# Altium PCB PCB1.PcbDoc
Units mil, origin at the board's own origin, x right, y up, seen from the top; angles counter-clockwise.
Board outline 8338.58 x 5307.09 mil, 2 copper layers (Top Layer, Bottom Layer); 100 components, 71 nets, 299 pads, 6 vias.
Unrouted connection lines stored in the file: 10.
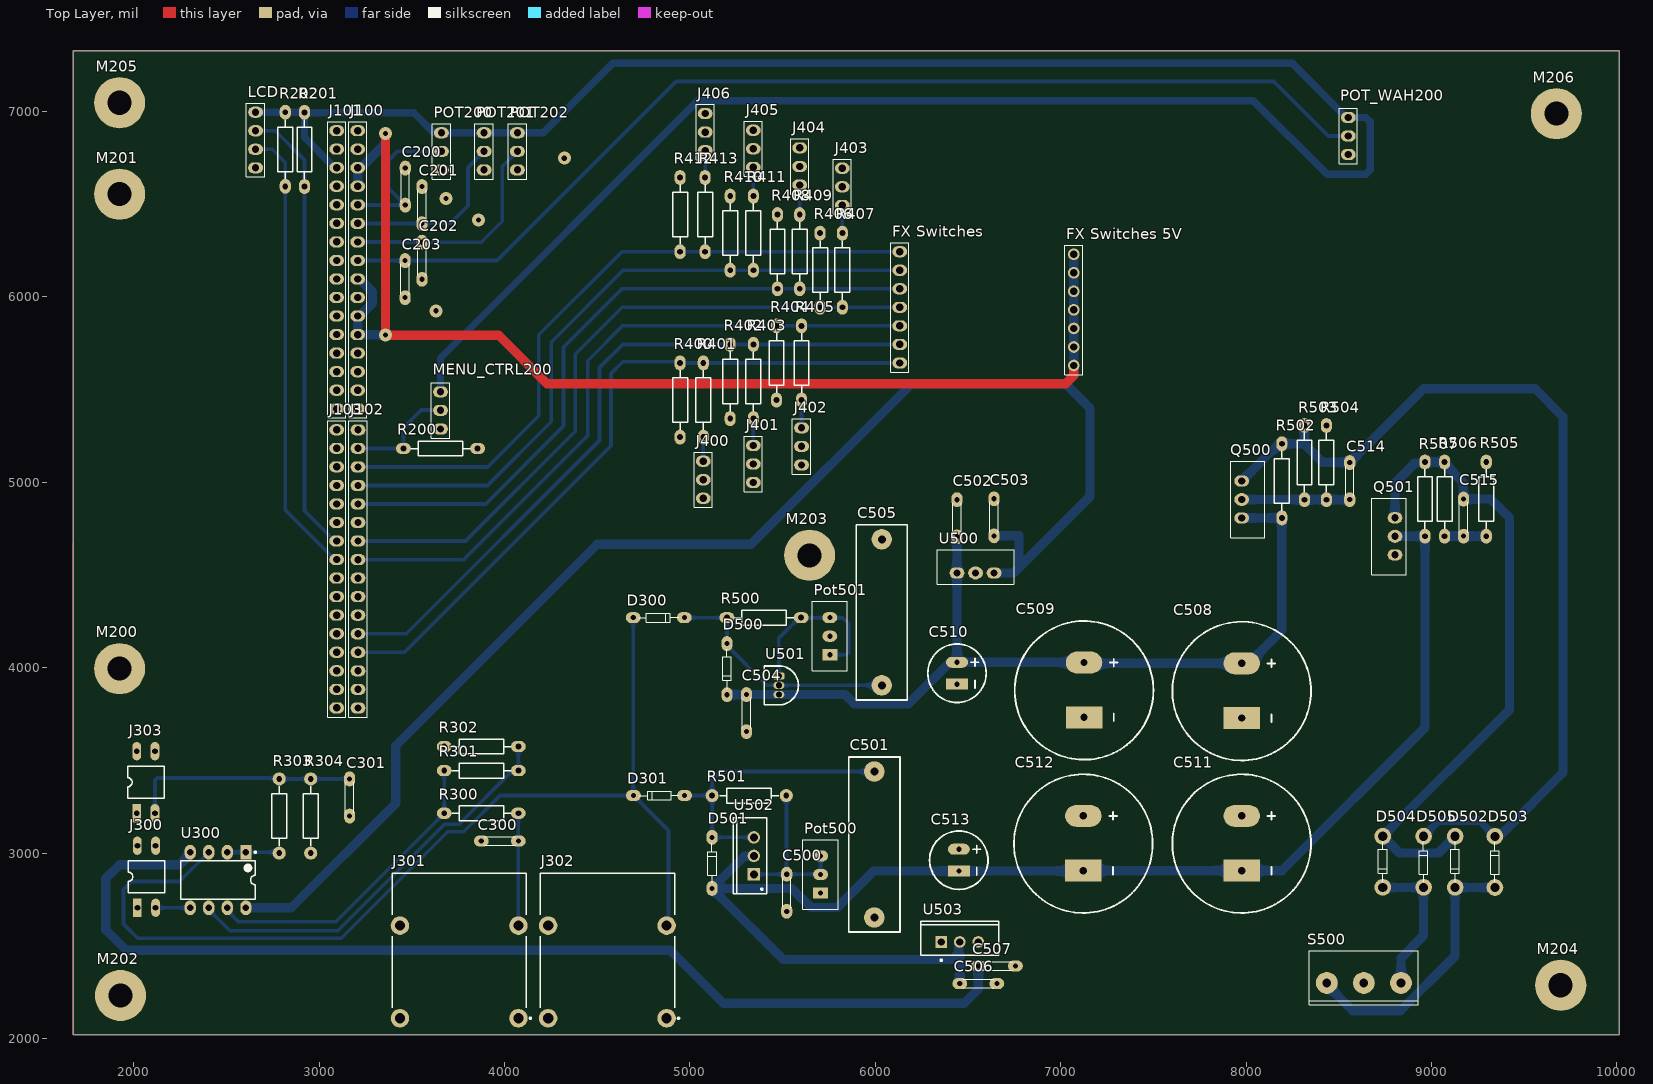
[diagram p0: Top Layer view]
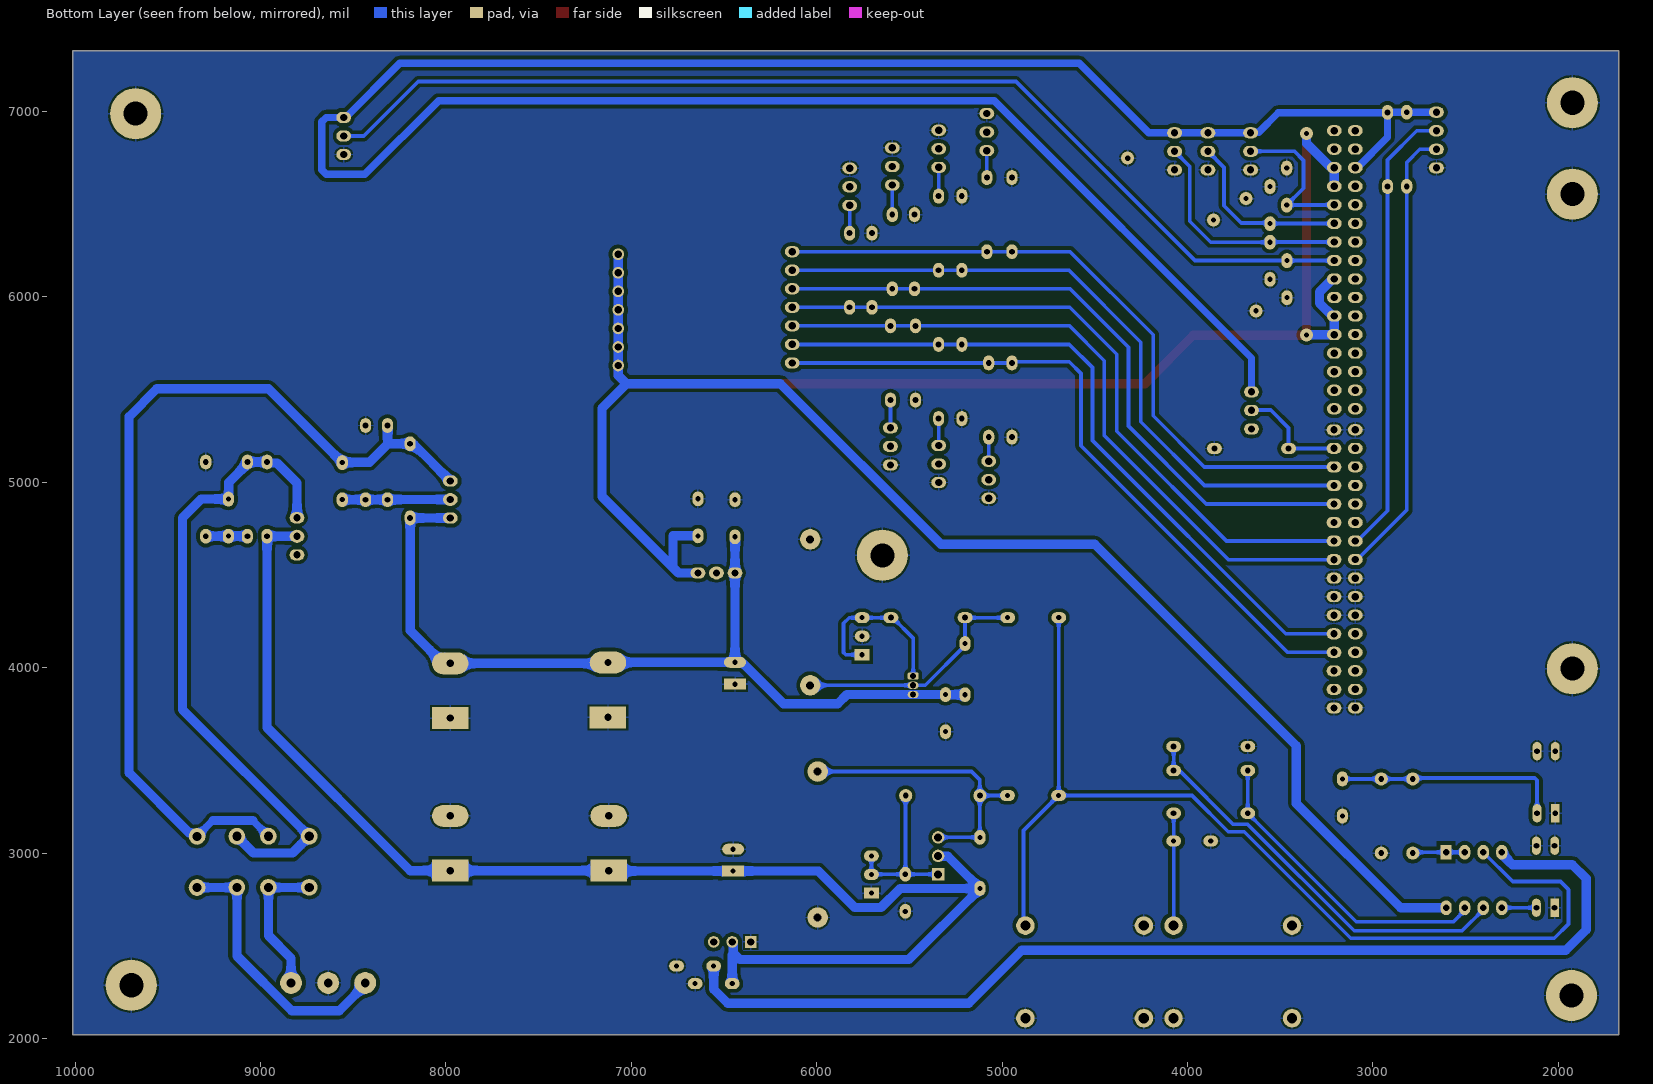
[diagram p1: Bottom Layer view, seen from below]

## Layer stack, top to bottom
Top Solder: solder mask 0.4, Solder Resist, Dk 3.5
Top Layer: signal copper 1.4
Dielectric 1: dielectric 12.6, FR-4, Dk 4.8
Bottom Layer: signal copper 1.4
Bottom Solder: solder mask 0.4, Solder Resist, Dk 3.5

## Board outline
1673.23,2019.68 1673.23,7326.77 10011.81,7326.77 10011.81,2019.68

## Design rules (kind name [scope] priority, off if disabled: settings)
Clearance [All] p1: gap=20 ignorepadtopadclearanceinfootprint=FALSE
PolygonConnect [All] p1: connectstyle=Relief reliefconductorwidth=10 reliefentries=4 polygonreliefangle="90 Angle" airgapwidth=10
RoutingVias [All] p1: holewidth=28 width=50 viastyle="Through Hole" minholewidth=28 minwidth=50 maxholewidth=28 maxwidth=50
SolderMaskExpansion [All] p1: expansion=4 istentingtop=FALSE
SupplyNets "Schematic Supply Nets_4" [InNet('VCC_USB_DUAL')] p1: voltage=0.000
SupplyNets "Schematic Supply Nets_8" [InNet('-6V')] p2: voltage=0.000
SupplyNets "Schematic Supply Nets_7" [InNet('VCC_3V3')] p3: voltage=0.000
SupplyNets "Schematic Supply Nets_6" [InNet('+6V')] p4: voltage=0.000
SupplyNets "Schematic Supply Nets_5" [InNet('-1V75')] p5: voltage=0.000
SupplyNets "Schematic Supply Nets_1" [InNet('-5V')] p6: voltage=0.000
SupplyNets "Schematic Supply Nets" [InNet('+1V75')] p7: voltage=0.000
SupplyNets "Schematic Supply Nets_3" [InNet('GND')] p8: voltage=0.000
Width [All] p1: maxlimit=40 minlimit=20 preferedwidth=20 minimp=50.000000 maximp=50.000000 favimp=50.000000
30 further rules are at their usual default settings.

## Classes and differential pairs
component class switches_connectors: C200 C201 C202 C203 "FX Switches 5V" LCD M200 M201 M202 M203 M204 M205 M206 MENU_CTRL200 POT200 POT201 POT202 POT_WAH200 R200 R201 R202
component class power_supply: *500 *501 *502 *503 C500 C501 C502 C503 C504 C505 C506 C507 C508 C509 C510 C511 C512 C513 C514 C515 D500 D501 D502 D503 D504 D505 Pot500 Pot501 Q500 Q501 R500 R501 R502 R503 R504 R505 R506 R507 S500 U500 U501 U502 U503
component class main: J100 J101 J102 J103
component class amplifier_stage: C300 C301 D300 D301 J300 J301 J302 J303 R300 R301 R302 R303 R304 U300
component class shift_registers: "FX Switches" J400 J401 J402 J403 J404 J405 J406 R400 R401 R402 R403 R404 R405 R406 R407 R408 R409 R410 R411 R412 R413

## Components (designator, comment, footprint, x,y, rotation, side; value= is the part's Value field where it differs from the comment)
C200 "Cap" Cap-1 3465,6695 r270 top
C201 "Cap" Cap-1 3555,6595 r270 top
C202 "Cap" Cap-1 3555,6095 r90 top
C203 "Cap" Cap-1 3464.26,5995.74 r90 top
C300 "Cap" Cap-1 3875,3065 r0 top
C301 "Cap" Cap-1 3165,3200 r90 top
C500 "Cap" Cap-1 5522.27,2886.13 r270 top
C501 "Cap" "Cap 20mm" 5995,3440 r270 top
C502 "Cap" Cap-1 6440.79,4906.06 r270 top
C503 "Cap" Cap-1 6640.79,4911.06 r270 top
C504 "Cap" Cap-1 5305,3655 r90 top
C505 "Cap" "Cap 20mm" 6035,4692.4 r270 top
C506 "Cap" Cap-1 6455.79,2296.06 r0 top
C507 "Cap" Cap-1 6555.79,2391.06 r0 top
C508 "Cap" "Cap Lyt Ø18" 7976.38,4023.62 r270 top
C509 "Cap" "Cap Lyt Ø18" 7125.98,4027.56 r270 top
C510 "Cap" "Cap Lyt Ø8" 6440.79,4029.17 r270 top
C511 "Cap" "Cap Lyt Ø18" 7976.38,3200.79 r270 top
C512 "Cap" "Cap Lyt Ø18" 7122.05,3200.79 r270 top
C513 "Cap" "Cap Lyt Ø8" 6450.79,3021.06 r270 top
C514 "Cap" Cap-1 8559.06,4906.3 r90 top value=1uF
C515 "Cap" Cap-1 9173.23,4909.45 r270 top value=1uF
D300 "Diode DO-35" "Diode 2 space"#1 4694.41,4270 r0 top
D301 "Diode DO-35" "Diode 2 space"#1 4971.11,3310.98 r180 top
D500 "Diode DO-35" "Diode 2 space"#1 5200,4130 r270 top
D501 "Diode DO-35" "Diode 2 space"#1 5120,2809.41 r90 top
D502 "Diode DO-35" "Diode 2 space"#2 9127.24,3090.71 r270 top
D503 "Diode DO-35" "Diode 2 space"#2 9342.24,2814.53 r90 top
D504 "Diode DO-35" "Diode 2 space"#2 8737.24,3090.71 r270 top
D505 "Diode DO-35" "Diode 2 space"#2 8957.24,2815.12 r90 top
"FX Switches" "Header 1x7" "Header 1x7"#1 6132.36,6243.78 r270 top
"FX Switches 5V" "Header 1x7" "Header 1x7"#2 7070.87,5629.92 r90 top
J100 "Header 1x16" "Header 1x16" 3208.43,5396.49 r90 top
J101 "Header 1x16" "Header 1x16" 3095,5396.7 r90 top
J102 "Header 1x16" "Header 1x16" 3210,3783.06 r90 top
J103 "Header 1x16" "Header 1x16" 3094.95,3783.27 r90 top
J300 "3.5MMJACK" 3.5MMJACK 2020,2705.35 r90 top
J301 "NMJ4HFD2" FP-NMJ4HFD2-MFG 3755.91,2236.22 r270 top
J302 "NMJ4HFD2" FP-NMJ4HFD2-MFG 4555.12,2236.22 r270 top
J303 "3.5MMJACK" 3.5MMJACK 2016.57,3215 r90 top
J400 "Header 1x3" "Header 1x3" 5072.36,4913.78 r90 top
J401 "Header 1x3" "Header 1x3" 5342.36,4998.78 r90 top
J402 "Header 1x3" "Header 1x3" 5602.36,5093.78 r90 top
J403 "Header 1x3" "Header 1x3" 5822.36,6693.78 r270 top
J404 "Header 1x3" "Header 1x3" 5592.36,6803.78 r270 top
J405 "Header 1x3" "Header 1x3" 5342.36,6898.78 r270 top
J406 "Header 1x3" "Header 1x3" 5082.36,6988.78 r270 top
LCD "Header 1x4" "Header 1x4" 2657.48,6696.06 r90 top
M200 "Screw Hole" "M3 Hole" 1924.13,3995 r0 top
M201 "Screw Hole" "M3 Hole" 1924.13,6554.25 r0 top
M202 "Screw Hole" "M3 Hole" 1929.13,2232.28 r0 top
M203 "Screw Hole" "M3 Hole" 5645.67,4606.3 r0 top
M204 "Screw Hole" "M3 Hole" 9696.85,2287.4 r0 top
M205 "Screw Hole" "M3 Hole" 1924.13,7047.24 r0 top
M206 "Screw Hole" "M3 Hole" 9673.23,6988.19 r0 top
MENU_CTRL200 "Header 1x3" "Header 1x3" 3655,5287.89 r90 top
POT200 "Header 1x3" "Header 1x3" 3660,6685 r90 top
POT201 "Header 1x3" "Header 1x3" 3890,6685 r90 top
POT202 "Header 1x3" "Header 1x3" 4070,6685 r90 top
Pot500 "Pot Trim" "Pot trim slim high" 5705,2885 r90 top
Pot501 "Pot Trim" "Pot trim slim high" 5755,4170 r90 top
POT_WAH200 "Header 1x3" "Header 1x3" 8551.18,6767.72 r90 top
Q500 "ModelNum" TO-220#1 7976.38,5007.09 r270 top
Q501 "ModelNum" TO-220#1 8803.15,4608.66 r90 top
R200 "Res2" "AXIAL-0.4 PCBK"#1 3655,5182.24 r180 top value=100
R201 "" "AXIAL-0.4 PCBK"#1 2921.26,6795.28 r90 top value=1k
R202 "" "AXIAL-0.4 PCBK"#1 2817.83,6796.27 r90 top value=1k
R300 "Res2" "AXIAL-0.4 PCBK"#1 3875,3215 r0 top value=1k47
R301 "Res2" "AXIAL-0.4 PCBK"#1 3875,3445 r180 top value=14k7
R302 "Res2" "AXIAL-0.4 PCBK"#1 3875,3575 r0 top value=10k
R303 "Res2" "AXIAL-0.4 PCBK"#2 2785,3200 r90 top value=1k47
R304 "Res2" "AXIAL-0.4 PCBK"#2 2955,3200 r90 top value=1k
R400 "" "AXIAL-0.4 PCBK"#1 4947.36,5443.78 r90 top value=4k
R401 "" "AXIAL-0.4 PCBK"#1 5072.36,5443.78 r90 top value=400
R402 "" "AXIAL-0.4 PCBK"#1 5217.36,5543.78 r90 top value=4k
R403 "" "AXIAL-0.4 PCBK"#1 5342.36,5543.78 r90 top value=400
R404 "" "AXIAL-0.4 PCBK"#1 5467.36,5643.78 r90 top value=4k
R405 "" "AXIAL-0.4 PCBK"#1 5602.36,5643.78 r90 top value=400
R406 "" "AXIAL-0.4 PCBK"#1 5702.36,6143.78 r270 top value=4k
R407 "" "AXIAL-0.4 PCBK"#1 5822.36,6143.78 r270 top value=400
R408 "" "AXIAL-0.4 PCBK"#1 5472.36,6243.78 r270 top value=4k
R409 "" "AXIAL-0.4 PCBK"#1 5592.36,6243.78 r270 top value=400
R410 "" "AXIAL-0.4 PCBK"#1 5217.36,6343.78 r270 top value=4k
R411 "" "AXIAL-0.4 PCBK"#1 5342.36,6343.78 r270 top value=400
R412 "" "AXIAL-0.4 PCBK"#1 4947.36,6443.78 r270 top value=4k
R413 "" "AXIAL-0.4 PCBK"#1 5082.36,6443.78 r270 top value=400
R500 "" "AXIAL-0.4 PCBK"#1 5400,4270 r180 top value=240
R501 "" "AXIAL-0.4 PCBK"#2 5320,3310 r0 top value=120
R502 "" "AXIAL-0.4 PCBK"#1 8192.91,5007.87 r90 top value=10
R503 "" "AXIAL-0.4 PCBK"#1 8314.96,5106.3 r90 top value=200k
R504 "" "AXIAL-0.4 PCBK"#1 8433.07,5106.3 r270 top value=10k
R505 "" "AXIAL-0.4 PCBK"#1 9295.28,4909.45 r90 top value=10k
R506 "" "AXIAL-0.4 PCBK"#1 9070.87,4909.45 r270 top value=200k
R507 "" "AXIAL-0.4 PCBK"#1 8964.57,4909.45 r90 top value=10
S500 "Screw 3" Screw-3 8435.39,2300 r0 top
U300 "OP275GPZ" ADI-N-8 2455,2855 r270 top
U500 "LM7805" TO-220#2 6440.79,4511.06 r0 top
U501 "LM317" TO-92_straight 5480,3955 r270 top
U502 "LM337SP" TO220 5345,2985 r90 top
U503 "LM7905CT/NOPB" NDE0003A 6455.79,2521.06 r0 top

## Footprints (in the part's own frame and the unit in brackets; to place one, negate y for a bottom-side part, rotate by r counter-clockwise, add the part's x,y. Pads: shape width x height; smd on the part's side, far side on the other; paste and mask are expansions set on the pad)
3.5MMJACK [mm]
  rect 2.5x1.2 hole 0.8: 1(0,0)
  oval 2.5x1.2 hole 0.8: 2(8.5,0) 3(0,-2.5) 4(8.5,-2.5)
  silkscreen extent 2.08,-3.75 6.42,1.25
ADI-N-8 [mil] "DIP, 8-Leads, Body 9.59x6.6mm, Pitch 2.54mm"
  rect 80x60 hole 35.43: 1(-150,150)
  oval 80x60 hole 35.43: 2(-150,50) 3(-150,-50) 4(-150,-150) 5(150,-150) 6(150,-50) 7(150,50) 8(150,150)
  silkscreen extent -155,-201 104,206, body extent -155,-200 155,200, height 210
"AXIAL-0.4 PCBK"#1 [mil]
  oval 80x60 hole 31.5: 1(-200,0) 2(200,0)
  silkscreen extent -160,-40 160,40
"AXIAL-0.4 PCBK"#2 [mil]
  round 70.87 hole 31.5: 1(-200,0) 2(200,0)
  silkscreen extent -160,-40 160,40
"Cap 20mm" [mm] "Capacitor with 20mm hole distance (center)"
  round 2.8 hole 1.1: 1(0,0) 2(20,0)
  silkscreen extent -2,-3.5 22,3.5
"Cap Lyt Ø8" [mm] "Capacitor"
  oval 1.5x3 hole 0.7: 1(0,0)
  rect 1.5x3 hole 0.7: 2(3,0)
  silkscreen extent -2.5,-4 5.5,4
"Cap Lyt Ø18" [mm] "Capacitor"
  oval 3x5 hole 1: 1(0,0)
  rect 3x5 hole 1: 2(7.5,0)
  silkscreen extent -5.7,-9.5 13.3,9.5, body extent -5.5,-9.25 13,9.25, height 38
Cap-1 [mil] "Capacitor with 1 space"
  oval 80x60 hole 27.56: 1(0,0) 2(200,0)
  silkscreen extent 18,-23 182,23
"Diode 2 space"#1 [mil] "Diode 2 emty spaces"
  oval 80x60 hole 27.56: 1(0,0) 2(275.59,0)
  silkscreen extent 31,-24 245,24, body extent -9,-30 284,30, height 59
"Diode 2 space"#2 [mil] "Diode 2 emty spaces"
  round 90 hole 50: 1(0,0) 2(275.59,0)
  silkscreen extent 31,-24 245,24, body extent -9,-30 284,30, height 59
FP-NMJ4HFD2-MFG [mm]
  round 2.54 hole 1.4 paste-2539.97 mask+0: S(3.225,8.115) SN(3.225,-8.115) T(-9.475,8.115) TN(-9.475,-8.115)
  silkscreen extent -16.63,-9.2 3.35,9.88, body extent -16.73,-9.3 16.73,9.3, height 0.25
"Header 1x3" [mil]
  oval 60x80 hole 39.37: 1(0,0) 2(100,0) 3(200,0)
  silkscreen extent -49,-49 249,49, body extent -50,-50 250,50, height 350
"Header 1x4" [mil]
  oval 60x80 hole 39.37: 1(0,0) 2(100,0) 3(200,0) 4(300,0)
  silkscreen extent -49,-49 349,49, body extent -50,-50 350,50, height 350
"Header 1x7"#1 [mil]
  oval 60x80 hole 39.37: 1(0,0) 2(100,0) 3(200,0) 4(300,0) 5(400,0) 6(500,0) 7(600,0)
  silkscreen extent -49,-49 649,49, body extent -50,-50 650,50, height 350
"Header 1x7"#2 [mil]
  round 62.99 hole 39.37: 1(0,0) 2(100,0) 3(200,0) 4(300,0) 5(400,0) 6(500,0) 7(600,0)
  silkscreen extent -49,-49 649,49, body extent -50,-50 650,50, height 350
"Header 1x16" [mil]
  oval 60x80 hole 39.37: 1(0,0) 2(100,0) 3(200,0) 4(300,0) 5(400,0) 6(500,0) 7(600,0) 8(700,0) 9(800,0) 10(900,0) 11(1000,0) 12(1100,0) 13(1200,0) 14(1300,0) 15(1400,0) 16(1500,0)
  silkscreen extent -49,-49 1549,49, body extent -50,-50 1550,50, height 350
"M3 Hole" [mm]
  round 7 hole 3.3 mask+0: 1(0,0)
NDE0003A [mm] "FM, 3-Leads, Body 10.7x4.7mm, Pitch 2.54mm"
  rect 1.6x1.6 hole 1: 1(-2.54,0)
  round 1.6 hole 1: 2(0,0) 3(2.54,0)
  silkscreen extent -5.35,-2.62 5.35,2.85, body extent -5.4,-1.9 5.4,2.9, height 19.4
"Pot trim slim high" [mil]
  rect 60x80 hole 27.95: 1(-100,0)
  oval 60x80 hole 27.95: 2(0,0) 3(100,0)
  silkscreen extent -188,-95 188,95, body extent -188,-95 188,95, height 455
Screw-3 [mm] "Screw Terminal with 3 connections"
  round 3 hole 1.2: 1(0,0) 2(5.075,0) 3(10.15,0)
  silkscreen extent -2.37,-3.03 12.52,4.43, body extent -2.95,-3.8 12.55,4, height 10.3
TO220 [mm] "TO, Thru-Hole, Vertical, Heatsink Mounted; 3 In-Line Leads; Pitch 2.54 mm"
  rect 1.7x1.7 hole 1.1: 1(-2.54,0)
  round 1.7 hole 1.1: 2(0,0) 3(2.54,0)
  silkscreen extent -5.2,-1.75 5.2,2.85, body extent -5.25,-1.8 5.25,2.9, height 19.7
TO-92_straight [mm] "Transistor Outline 3 leads"
  rrect50% 1x1.5 hole 0.85 mask+0.05: 1(0,0)
  oval 1x1.5 hole 0.85 mask+0.05: 2(1.27,0) 3(2.54,0)
  silkscreen extent -1.4,-2 3.94,2.67, body extent -1.24,-1.85 3.78,2.5, height 5.4
TO-220#1 [mil] "Transistor Outline 3 leads"
  oval 60x80 hole 39.37: 1(0,0) 3(200,0) ""(100,0)
  round 70.87 hole 39.37: 2(100,0)
  silkscreen extent -107,-60 306,125, body extent -101,-73 300,116, height 744
TO-220#2 [mil] "Transistor Outline 3 leads"
  oval 80x60 hole 39.37: 1(0,0) 3(200,0) 4(100,0)
  round 70.87 hole 39.37: 2(100,0)
  silkscreen extent -107,-60 306,125, body extent -101,-73 300,116, height 744

## Part data
C200 C201 C202 C203 C502 C503 C506 C507: library part "Capacitor 1 space", Capacity=2,2nF
C300: library part "Capacitor 1 space", Capacity=5n5F
C301: library part "Capacitor 1 space", Capacity=12nF
C500 C504: library part "Capacitor 1 space", Capacity=100nF
C501 C505: library part "Capacitor big ceramic", Capacity=1uF
C508 C511 C512: library part "Capacitor electrolytic", Capacity=1000uF
C509: library part "Capacitor electrolytic", Capacity=1000F
C510 C513: library part "Capacitor electrolytic", Capacity=220uF
C514 C515: library part "Capacitor 1 space"
J301 J302: library part CMP-78736-000001-1, "Conn 1/4\" Mono Jack F 3 POS Solder RA Thru-Hole 3 Terminal 1 Port", Current Rating=0.5A, Manufacturer=Neutrik, Package=0, Temperature="-25°C to +70°C", Temperature Range High=+70°C, Temperature Range Low=-25°C, Voltage Rating=50V, Automotive=No, Category=Conn, ComponentLink2Description=Datasheet, ComponentLink2URL=https://www.neutrik.com/en/product/nmj4hfd2.pdf, Conn Orientation=Horizontal, Contact Material=Silver, Device Class L1=Connectors, Device Class L2="Audio / Video Connectors", Device Class L3=unset, Footprint Url=https://www.neutrik.com/media/8576/download/st-nmj4hfd2.pdf?v=1, Height=15.89mm, Is Female=yes, Lead Free=Yes, Manufacturer Part Number=NMJ4HFD2, Mouser Description="Phone Audio Connector, Socket, 2, PCB Mount, Metal Body, Silver Plated Contacts", Number Of Contacts=2, Octopart=https://octopart.com/nmj4hfd2-neutrik-758952, RoHS=TRUE
Pot500 Pot501: "Potentiometer", Resistance=2k
Q500: library part "MOSFET P-Channel", Model=ModelNumber
Q501: library part "MOSFET N-Channel", Model=ModelNumber
R200 R201 R202 R300 R301 R302 R303 R304 R400 R401 R402 R403 R404 R405 R406 R407 R408 R409 R410 R411 R412 R413 R500 R501 R502 R503 R504 R505 R506 R507: library part "Res PCBK", "Resistor", LatestRevisionDate=17-Jul-2002, LatestRevisionNote="Re-released for DXP Platform.", PackageReference=AXIAL-0.4, Published=8-Jun-2000, Publisher="Altium Limited"
U300: library part CMP-0384-00207-1, "Double Channel Excellent Sonic Characteristics Operational Amplifier, 9 MHz BW, 22 V/us SR, Industrial, 8-pin DIP (N-8), Tube", Amplifiers Per Package=2, Generic Part Number=OP275, Input Bias Current=100nA, Input Offset Voltage=1mV, Manufacturer="Analog Devices", Code_JEDEC=MS-001, ComponentLink1Description="Manufacturer URL", ComponentLink1URL=http://www.analog.com/en/index.html, ComponentLink2Description=Datasheet, ComponentLink2URL=http://www.analog.com/static/imported-files/data_sheets/OP275.pdf, ComponentLink3Description="Package Specification", ComponentLink3URL=http:/www.analog.com/static/imported-files/packages/PKG_PDF/PDIP(N)/N_8.pdf, DatasheetVersion="Rev. C", Iq/Amp=2.5mA, Mounting Technology="Through Hole", PackageDescription="8-Pin Plastic Dual In-Line Package, Row spacing 7.62 mm, Pitch 2.54 mm", PackageReference=N-8, PackageVersion=070606-A, PartNumber=OP275GPZ, Slew Rate=22V/us, Small Signal Bandwidth=9MHz, V Span Max=44V, V Span Min=9V
U500: library part "Voltage Regulator"
U502: library part CMP-0244-00420-1, "Three-Terminal Negative Voltage Regulator, 3-Pin TO-220", ComponentLink1Description="Manufacturer URL", ComponentLink1URL=http://www.st.com, ComponentLink2Description=Datasheet, ComponentLink2URL=http://www.st.com/internet/com/TECHNICAL_RESOURCES/TECHNICAL_LITERATURE/DATASHEET/CD00000468.pdf, ComponentLink3Description="Package Specification", ComponentLink3URL=http://www.st.com/internet/com/TECHNICAL_RESOURCES/TECHNICAL_LITERATURE/PACKAGE_INFORMATION/CD00004649.pdf, DatasheetVersion=1/10/2011, PackageDescription="TO, Thru-Hole, Vertical, Heatsink Mounted; 3 In-Line Leads; Pitch 2.54 mm", PackageReference=TO220, PackageVersion=ver3.0
U503: library part CMP-0062-02481-3, "3-Terminal Negative Regulator, 3-pin TO-220, Pb-Free", Manufacturer="Texas Instruments", PackageTopMarking=NSUZXYTTE#*LM7905CT, PowerWise=N, ComponentLink1Description="Datasheet URL", ComponentLink1URL=http://www.ti.com/general/docs/lit/getliterature.tsp?genericPartNumber=LM7905&fileType=pdf, CompType="LDO IC", PackageDescription="TO-220, Molded, 3 Lead, Straight", PackageReference=NDE0003A, PinCount=3, RoHS=Y
D300 D301 D500 D501 D502 D503 D504 D505: Model=Model

## Via types
v1: diameter 70, hole 28, Top Layer to Bottom Layer, 6 vias

## Nets (pads, with @x,y where several pads share a name; then routed paths per layer and width w, separated by ;. In a path a pad name is that pad's centre, name@x,y a point inside that pad or via, vN(x,y) a via of type N, cw(c..) or ccw(c..) an arc to the next point about the centre after c; other vN are vias at no path point)
+1V75: C505.2 D300.2 D500.1 R500.2 U501.2 | length 1304.1
  Bottom Layer w20: D300.2 R500.2 D500.1 5200,4120 5415,3905 U501.2 C505.2
+6V: C502.2 C504.2 C508.1 C509.1 C510.1 D500.2 Q500.3 R502.1 U500.1 U501.3 | length 4679.9
  Bottom Layer w50: D500.2 5200.3,3854.7 5304.7,3854.7 C504.2 U501.3 5836.58,3855 5886.7,3804.88 6178.63,3804.88 C510.1@6394.81,4021.06 ; C510.1@6400.7,4021.06 6408.81,4029.17 C510.1 ; C502.2 U500.1 6440.98,4510.87 6440.98,4029.36 C510.1 ; C509.1 C509.1@7124.37,4029.17 ; Q500.3 7976.77,4807.48 8192.52,4807.48 R502.1 8192.91,4200.79 8015.75,4023.62 C508.1 7129.92,4023.62 C509.1@7124.37,4029.17 ; C510.1 C509.1@7124.37,4029.17
-1V75: C501.1 D301.1 D501.2 R501.1 U502.3 | length 1577.9
  Bottom Layer w20: D301.1 4971.6,3310.49 5119.51,3310.49 R501.1 ; U502.3 D501.2 R501.1 ; C501.1 5165,3440 5120,3395 R501.1
-5V: C507.1 U300.4 U503.3 | length 5822.1
  Bottom Layer w50: U300.4 2301.73,3001.73 2301.73,2991.73 2247.26,2937.26 1924.48,2937.26 1850,2862.78 1850,2587.01 1960.63,2476.38 4893.62,2476.38 5180,2190 6479.42,2190 6555.79,2266.36 C507.1
-6V: C506.1 C511.2 C512.2 C513.2 D501.1 Q501.2 R507.1 U502.2 U503.2 | length 7486.5
  Bottom Layer w50: D501.1@5131.91,2797.5 5503.35,2426.06 6414.43,2426.06 6450.05,2461.68 6450.05,2515.32 U503.2 ; U502.2 5343.09,2983.09 5293.68,2983.09 5131.91,2821.32 5124.62,2821.32 5120,2816.7 D501.1 5550.02,2809.41 5652.9,2706.54 5794.33,2706.54 5990.75,2902.95 C512.2@7119.49,2902.95 ; C506.1 6455.79,2452.42 ; C512.2 C511.2 8192.91,2905.51 8964.57,3677.17 R507.1 8964.17,4709.06 8812.79,4709.06 8803.54,4709.06 Q501.2
GND: C200.1 C201.1 C202.1 C203.1 C300.1 C301.1 C500.2 C501.2 C502.1 C503.1 C504.1 C505.1 C506.2 C507.2 C508.2 C509.2 C510.2 C511.1 C512.1 C513.1 J102.1 J102.6 J102.7 J102.8 J102.16 J103.1 J103.6 J103.7 J103.8 J103.16 J300.1 J300.2 J300.4 J301.S J301.SN J301.TN J302.S J302.SN J302.TN J303.1 J303.2 J303.4 J400.1 J401.1 J402.1 J403.1 J404.1 J405.1 J406.1 LCD.1 M200.1 M201.1 M202.1 M203.1 M204.1 M205.1 M206.1 POT200.1 POT201.1 POT202.1 Pot500.1 Pot501.2 POT_WAH200.1 R200.1 R302.1 R304.1 R400.1 R402.1 R404.1 R406.1 R408.1 R410.1 R412.1 R504.1 R505.2 S500.2 U500.2 U503.1 | length 11.6
  Bottom Layer w20: POT201.1@3881.77,6676.77 POT201.1
  other v1: 3630,5925 3860,6415 3685,6530 4322.83,6748.03
GPAIN0: C200.2 J100.12 POT200.2 | length 842.9
  Bottom Layer w20: J100.12 3208.51,6496.49 3210,6495 3210.74,6495.74 3464.26,6495.74 C200.2 3374.02,6585.98 3374.02,6736.22 3422.8,6785 POT200.2
GPAIN1: C201.2 J100.11 POT201.2 | length 963.9
  Bottom Layer w20: J100.11 3209.17,6395.74 C201.2@3554.26,6395.74 ; C201.2 3558.67,6398.67 3710.64,6398.67 3803.15,6491.18 3803.15,6698.15 POT201.2
GPAIN2: C202.2 J100.10 POT202.2 | length 1236.9
  Bottom Layer w20: J100.10 3209.17,6295.74 C202.2@3554.26,6295.74 ; C202.2 3875,6295 3988.19,6408.19 3988.19,6703.19 POT202.2
GPAIN3: C203.2 J100.9 POT_WAH200.2 | length 5864.7
  Bottom Layer w20: J100.9 3208.8,6196.11 3463.89,6196.11 C203.2 3959.52,6195.74 4925.2,7161.42 8149.61,7161.42 8443.31,6867.72 POT_WAH200.2
GPIO4: J102.15 MENU_CTRL200.2 R200.2 | length 605.5
  Bottom Layer w20: J102.15@3210.41,5182.65 R200.2@3454.59,5182.65 ; R200.2 3455,5293.58 3551.18,5389.76 3653.13,5389.76 MENU_CTRL200.2
  Bottom Layer w40: J102.15 J102.15@3210.41,5182.65 ; R200.2@3448.82,5188.43 3454.59,5182.65 R200.2
GPIO5: "FX Switches.1" J102.14 R412.2 R413.2 | length 3659
  Bottom Layer w20: J102.14 3909.83,5083.06 4185.32,5358.54 4185.32,5795.24 4633.86,6243.78 R413.2 6132.36,6243.78
GPIO10: "FX Switches.2" J102.13 R410.2 R411.2 | length 3654.5
  Bottom Layer w20: J102.13 3908.26,4983.06 4251.97,5326.77 4251.97,5755.91 4639.84,6143.78 R410.2 R411.2 6132.36,6143.78
GPIO11: "FX Switches.3" J102.12 R408.2 R409.2 | length 3652.2
  Bottom Layer w20: J102.12 3898.81,4883.06 4318.9,5303.15 4318.9,5728.35 4634.33,6043.78 R408.2 R409.2 6132.36,6043.78
GPIO12: J102.3
GPIO13: J102.2
GPIO14: "FX Switches.7" J102.4 R400.2 R401.2 | length 3802
  Bottom Layer w20: J102.4 3461.01,4083.06 4574.8,5196.85 4574.8,5586.61 4637.8,5649.61 4941.54,5649.61 R400.2 R401.2 6132.36,5643.78
GPIO15: "FX Switches.6" J102.5 R402.2 R403.2 | length 3799.1
  Bottom Layer w20: J102.5 3470.46,4183.06 4513.07,5225.67 4513.07,5618.74 4638.11,5743.78 R403.2 6132.36,5743.78
GPIO16: "FX Switches.5" J102.9 R404.2 R405.2 | length 3681.3
  Bottom Layer w20: J102.9 3779.91,4583.06 4448.82,5251.97 4448.82,5656.06 4636.54,5843.78 R404.2 R405.2 6132.36,5843.78
GPIO17: "FX Switches.4" J102.10 R406.2 R407.2 | length 3687.7
  Bottom Layer w20: J102.10 3789.36,4683.06 4381.89,5275.59 4381.89,5690.71 4634.96,5943.78 R407.2 6132.36,5943.78
I2C_SCL: J103.10 LCD.3 R201.1 | length 2462.4
  Bottom Layer w20: LCD.3 2764.25,6896.06 2921.26,6739.05 R201.1 2921.26,4846.97 3084.95,4683.27 J103.10
I2C_SDA: J103.9 LCD.2 R202.1 | length 2452.4
  Bottom Layer w20: LCD.2 2747.24,6796.06 2817.83,6725.48 R202.1 2817.83,4850.4 3084.95,4583.27 J103.9
I2S0_CLK: J101.7
I2S0_DX: J101.9
I2S0_FS: J101.10
I2S0_RX: J101.8
I2S1_CLK: J101.1
I2S1_DX: J101.3
I2S1_FS: J101.4
I2S1_RX: J101.2
I2S2_CLK: J103.12
I2S2_DX: J103.14
I2S2_FS: J103.15
I2S2_RX: J103.13
KEY: J102.11 J103.11
NC: J100.15 J100.16 J101.15 J101.16
NetC300_2: C300.2 J301.T R300.2 | length 606.8
  Bottom Layer w20: R300.2 4075,3100 4074.49,3099.49 4074.49,3065.51 C300.2 4074.49,3064.49 4074.49,2610.16 J301.T
NetC301_2: C301.2 J303.3 R303.2 R304.2 | length 1235.2
  Bottom Layer w20: J303.3 2115,3393.28 2126.72,3405 2780,3405 R303.2 R304.2 C301.2
NetC500_1: C500.1 Pot500.2 Pot500.3 R501.2 U502.1 | length 885.7
  Bottom Layer w20: U502.1 5346.13,2886.13 C500.1 ; R501.2 5521.13,3308.87 5521.13,2887.26 C500.1 ; Pot500.3 Pot500.2 5704.44,2885.56 5522.83,2885.56 C500.1
NetC514_1: C514.1 Q500.2 R503.1 R504.2 | length 583
  Bottom Layer w50: Q500.2 7976.77,4906.69 8314.57,4906.69 R503.1 R504.2 C514.1
NetC514_2: C514.2 D503.2 D505.2 Q500.1 R502.2 R503.2 | length 5066.7
  Bottom Layer w40: D505.2 9042.24,3175.71 ; 9256.65,3175.71 D503.2
  Bottom Layer w50: Q500.1 8171.26,5201.97 8187.01,5201.97 R502.2 8314.96,5207.87 R503.2 ; 8314.96,5204.72 8412,5107.69 8557.67,5107.69 C514.2 8956.69,5503.94 9559.06,5503.94 9708.66,5354.33 9708.66,3433.07 9385.71,3110.12 9373.07,3110.12 9353.07,3090.12 D503.2 ; 9042.24,3175.71 9256.65,3175.71
NetC515_1: C515.1 D502.1 D504.1 R506.1 R507.2 | length 3499.5
  Bottom Layer w50: 8803.15,4808.66 8803.15,4996.06 8911.31,5104.22 8959.95,5104.22 8964.57,5108.84 R507.2 R506.1 9074.13,5106.18 9074.13,5096.18 9171.32,4999 9171.32,4911.36 C515.1 9318.9,4909.45 9421.26,4807.09 9421.26,3774.72 D504.1 8827.24,3000.71 9037.24,3000.71 D502.1
NetC515_2: C515.2 Q501.3 R505.1 R506.2 | length 224.4
  Bottom Layer w50: R506.2 R505.1
NetD300_1: D300.1 D301.2 J302.T U300.3 | length 5573.4
  Bottom Layer w20: U300.3 2246.46,2846.46 1988.19,2846.46 1944.88,2803.15 1944.88,2618.11 2022.01,2540.98 3119.72,2540.98 3693.74,3115 3780.35,3115 3976.34,3310.98 D301.2@4694.41,3310.98 ; D300.1 D301.2@4694.41,3310.98 ; J302.T 4884.49,2619.13 4884.49,3122.01 D301.2 D301.2@4694.41,3310.98
NetD502_2: D502.2 D503.1 S500.1 | length 1467.6
  Bottom Layer w50: S500.1 8435.39,2289.61 8575,2150 8832.16,2150 9127.24,2445.09 D502.2 9341.65,2815.12 D503.1
NetD504_2: D504.2 D505.1 S500.3 | length 799.3
  Bottom Layer w50: D504.2 D505.1 8957.24,2555.67 8835,2433.43 S500.3 ; D505.1@8947.68,2815.12 D505.1@8957.24,2805.55
NetJ300_3: J300.3 U300.5 | length 186.7
  Bottom Layer w20: J300.3 2118.78,2705 U300.5
NetJ400_3: J400.3 R401.1 | length 130
  Bottom Layer w20: J400.3 R401.1
NetJ401_3: J401.3 R403.1 | length 145
  Bottom Layer w20: J401.3 R403.1
NetJ402_3: J402.3 R405.1 | length 150
  Bottom Layer w20: J402.3 R405.1
NetJ403_3: J403.3 R407.1 | length 150
  Bottom Layer w20: R407.1 J403.3
NetJ404_3: J404.3 R409.1 | length 160
  Bottom Layer w20: R409.1 J404.3
NetJ405_3: J405.3 R411.1 | length 155
  Bottom Layer w20: R411.1 J405.3
NetJ406_3: J406.3 R413.1 | length 145
  Bottom Layer w20: R413.1 J406.3
NetPot501_1: Pot501.1 Pot501.3 R500.1 U501.1 | length 901.1
  Bottom Layer w20: U501.1 5480,4160 5590,4270 R500.1 5825,4270 5855,4240 5855,4081.72 5843.28,4070 Pot501.1
NetR300_1: R300.1 R301.2 U300.7 | length 1681.9
  Bottom Layer w20: U300.7 2505,2690.64 2565.72,2629.92 3089.92,2629.92 R300.1 R301.2
NetR301_1: R301.1 R302.2 U300.6 | length 2215.1
  Bottom Layer w20: U300.6 2405,2695 2519.02,2580.98 3100.67,2580.98 3674.68,3155 3753.43,3155 4035.77,3437.35 4067.35,3437.35 R301.1 R302.2
NetR303_1: R303.1 U300.1 U300.2 | length 282.1
  Bottom Layer w20: U300.2 U300.1 2780,3005 R303.1
SPI_CLK: J103.3
SPI_CS0: J101.12
SPI_CS1: J103.2
SPI_CS2: J101.11
SPI_CS3: J100.7
SPI_RX: J103.5
SPI_TX: J103.4
UART_CTS: J100.2
UART_RTS: J100.1
UART_RX: J100.3
UART_TX: J100.4
VCC_3V3: J101.5 J101.6 J101.13 J101.14 LCD.4 MENU_CTRL200.3 POT200.3 POT201.3 POT202.3 POT_WAH200.3 R201.2 R202.2 | length 12926
  Bottom Layer w40: LCD.4 2657.58,6996.17 2817.72,6996.17 R202.2 2818.32,6995.77 2920.76,6995.77 R201.2 ; J101.14 3085,6696.7 2921.26,6860.44 R201.2 ; MENU_CTRL200.3 3655,5670.41 5043.37,7058.78 5153.27,7058.78 8039.65,7058.78 8437.01,6661.42 8645.86,6661.42 8669.29,6684.85 8669.29,6944.28 8645.86,6967.72 8541.18,6967.72 8249.06,7259.84 4583.42,7259.84 4208.58,6885 POT202.3 POT201.3 POT200.3 3657.05,6887.95 3615.98,6887.95 3511.81,6992.13 2924.41,6992.13 R201.2
VCC_USB_DUAL: "FX Switches 5V.1" "FX Switches 5V.2" "FX Switches 5V.3" "FX Switches 5V.4" "FX Switches 5V.5" "FX Switches 5V.6" "FX Switches 5V.7" C503.2 J100.5 J100.6 J100.8 J100.13 J100.14 U300.8 U500.3 | length 14022.4
  Top Layer w40: J100.5 J100.5@3209.03,5795.88
  Top Layer w50: J100.14@3205.57,6693.63 J100.14 J100.14@3221.13,6696.49 ; v1(3358.27,5795.28) v1(3358.27,6881.89) ; v1@3366.14,5792.89 3968.5,5792.89 4229.9,5531.5 7026.42,5531.5 7070.87,5575.94 7070.87,5629.92
  Bottom Layer w50: U300.8 2850.67,2705 3413.39,3267.72 3413.39,3578.74 4500,4665.35 5330.14,4665.35 6196.28,5531.5 7026.42,5531.5 ; J100.8 3218.43,6096.49 3288.43,6026.49 3288.43,5966.49 3218.43,5896.49 J100.6 J100.5 3209.03,5795.88 3357.66,5795.88 v1(3358.27,5795.28) ; J100.13 J100.14 3223.84,6696.49 3233.84,6706.49 3236.43,6706.49 3357.88,6827.93 3357.88,6881.5 v1(3358.27,6881.89) ; U500.3 6745.36,4511.06 6774.65,4540.35 ; C503.2 6774.65,4711.06 6774.65,4540.35 ; 7070.87,6229.92 7070.87,6129.92 7070.87,6029.92 7070.87,5929.92 7070.87,5829.92 7070.87,5729.92 7070.87,5629.92 7070.87,5575.94 7026.42,5531.5 ; 6774.65,4540.35 7158.23,4923.94 7158.23,5399.69 7026.42,5531.5
pads on no net: J400.2 J401.2 J402.2 J403.2 J404.2 J405.2 J406.2 MENU_CTRL200.1 Q500. Q501. Q501.1 U500.4

## Polygon pours and split planes (outlines as drawn)
GND on Top Layer "GND" (solid, remove dead copper, shelved, pour order 3): 1672.34,2019.68 1674.11,7326.77 10011.81,7326.77 10011.81,2020
GND on Bottom Layer "GND" (solid, remove dead copper, pour order 2): 1673.23,2019.68 1673.23,7326.77 10011.81,7326.77 10011.81,2019.68